# Altium PCB PCB1.PcbDoc
Units mil, origin at the board's own origin, x right, y up, seen from the top; angles counter-clockwise.
Board outline 450 x 550 mil, 2 copper layers (Top Layer, Bottom Layer); 3 components, 9 nets, 19 pads, 2 vias.
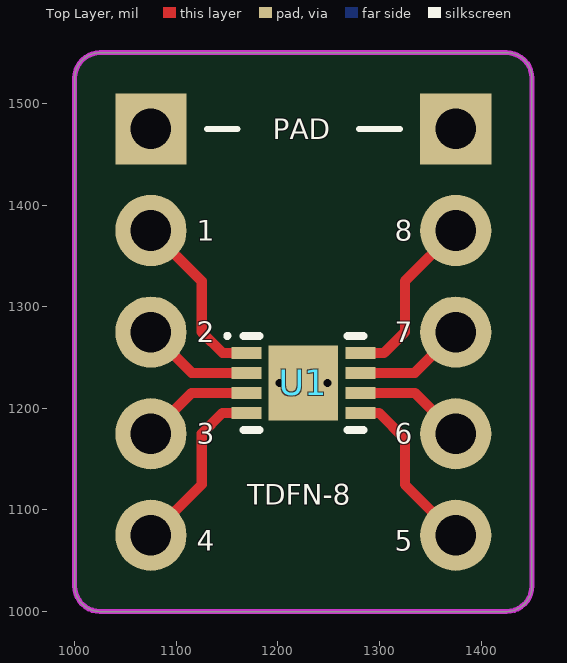
[diagram p0: Top Layer view]
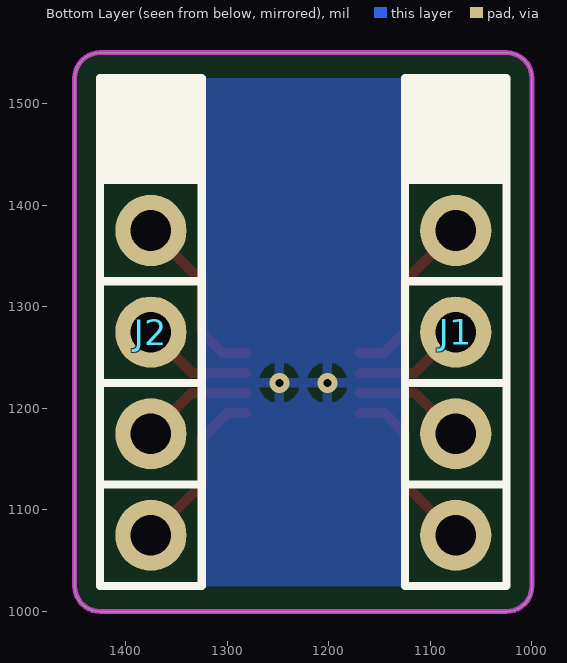
[diagram p1: Bottom Layer view, seen from below]

## Layer stack, top to bottom
Top Solder: solder mask 0.4, Solder Resist, Dk 3.5
Top Layer: signal copper 1.4
Dielectric 1: dielectric 12.6, FR-4, Dk 4.8
Bottom Layer: signal copper 1.4
Bottom Solder: solder mask 0.4, Solder Resist, Dk 3.5

## Board outline
1000,1025 1000,1525 cw(c1025,1525) 1025,1550 1425,1550 cw(c1425,1525) 1450,1525 1450,1025 cw(c1425,1025) 1425,1000 1025,1000 cw(c1025,1025)

## Design rules (kind name [scope] priority, off if disabled: settings)
Clearance [All] p1: gap=6
PolygonConnect [All] p1: connectstyle=Relief reliefconductorwidth=10 reliefentries=4 polygonreliefangle="90 Angle" airgapwidth=10
RoutingVias [All] p1: holewidth=28 width=50 viastyle="Through Hole" minholewidth=28 minwidth=50 maxholewidth=28 maxwidth=50
SolderMaskExpansion [All] p1: expansion=4
Width [All] p1: maxlimit=10 minlimit=10 preferedwidth=10
30 further rules are at their usual default settings.

## Components (designator, comment, footprint, x,y, rotation, side; value= is the part's Value field where it differs from the comment)
J1 "HEADER-1X5" HEADER-1X5 1075,1475 r180 bottom
J2 "HEADER-1X5" HEADER-1X5 1375,1475 r180 bottom
U1 "MAX16023LTAL12+T" T823+1_V 1225,1225 r0 top

## Footprints (in the part's own frame and the unit in brackets; to place one, negate y for a bottom-side part, rotate by r counter-clockwise, add the part's x,y. Pads: shape width x height; smd on the part's side, far side on the other; paste and mask are expansions set on the pad)
HEADER-1X5 [mil]
  rect 70x70 hole 40: 1(0,0)
  round 70 hole 40: 2(0,-100) 3(0,-200) 4(0,-300) 5(0,-400)
  silkscreen extent -50,-450 50,50, body extent -50,-450 50,50, height 470
T823+1_V [mm] "SON, 8-Leads, Body 2x3mm, Pitch 0.5mm, Thermal Pad 1.88x1.73 mm"
  rect 0.75x0.3 smd: 1(-1.425,0.75) 2(-1.425,0.25) 3(-1.425,-0.25) 4(-1.425,-0.75) 5(1.425,-0.75) 6(1.425,-0.25) 7(1.425,0.25) 8(1.425,0.75)
  rect 1.73x1.88 smd: 9(0,0)
  silkscreen extent -1.95,-1.18 1.5,1.22, body extent -1.52,-1.02 1.52,1.02, height 0.8

## Part data
J1 J2: "PINHEADER 1X5"
U1: "Battery-Backup Circuit with Regulated Output Voltage, 1.2V; 1.8V, 2.5V, 3.0V, 3.3V output, 8-Pin TDFN, -40°C to +85°C, Pb-Free, Tape and Reel"

## Via types
v1: diameter 19.68, hole 7.87, Top Layer to Bottom Layer, 2 vias

## Nets (pads, with @x,y where several pads share a name; then routed paths per layer and width w, separated by ;. In a path a pad name is that pad's centre, name@x,y a point inside that pad or via, vN(x,y) a via of type N, cw(c..) or ccw(c..) an arc to the next point about the centre after c; other vN are vias at no path point)
GND: J1.1 J2.1 U1.9
  other v1: 1201.38,1225 1248.62,1225
NetJ1_2: J1.2 U1.1 | length 173.1
  Top Layer w10: J1.2 1125,1325 1125,1275 1145.47,1254.53 U1.1
NetJ1_3: J1.3 U1.2 | length 110.5
  Top Layer w10: J1.3 1115.16,1234.84 U1.2
NetJ1_4: J1.4 U1.3 | length 110.5
  Top Layer w10: J1.4 1115.16,1215.16 U1.3
NetJ1_5: J1.5 U1.4 | length 173.1
  Top Layer w10: J1.5 1125,1125 1125,1175 1145.47,1195.47 U1.4
NetJ2_2: J2.2 U1.8 | length 173.1
  Top Layer w10: U1.8 1304.53,1254.53 1325,1275 1325,1325 J2.2
NetJ2_3: J2.3 U1.7 | length 110.5
  Top Layer w10: U1.7 1334.84,1234.84 J2.3
NetJ2_4: J2.4 U1.6 | length 110.5
  Top Layer w10: U1.6 1334.84,1215.16 J2.4
NetJ2_5: J2.5 U1.5 | length 170.2
  Top Layer w10: U1.5 1299.53,1195.47 1325,1170 1325,1125 J2.5

## Polygon pours and split planes (outlines as drawn)
GND on Bottom Layer "PAD" (solid, remove dead copper, pour order 2): 1025,1525 1425,1525 1425,1425 1325,1425 1325,1025 1125,1025 1125,1425 1025,1425 1025,1525

## Keep-outs
Keep-Out Layer:
  the board outline again, w5

## Silkscreen, mask and mechanical layers (free items; w line width, h text height)
Top Overlay:
  lines w5.91: 1130,1475 1160,1475 ; 1280,1475 1320,1475
  text "PAD" at 1195,1465 h20
  text "1" at 1120,1365 h20
  text "8" at 1315,1365 h20
  text "2" at 1120,1265 h20
  text "7" at 1315,1265 h20
  text "3" at 1120,1165 h20
  text "6" at 1315,1165 h20
  text "TDFN-8" at 1170,1105 h20
  text "4" at 1120,1060 h20
  text "5" at 1315,1060 h20